# Altium PCB AM335x_EVM_PMconnect_Rev2.PcbDoc
Units mil, origin at the board's own origin, x right, y up, seen from the top; angles counter-clockwise.
Board outline 4530 x 4250 mil, 2 copper layers (Top Layer, Bottom Layer); 22 components, 40 nets, 104 pads, 7 vias.
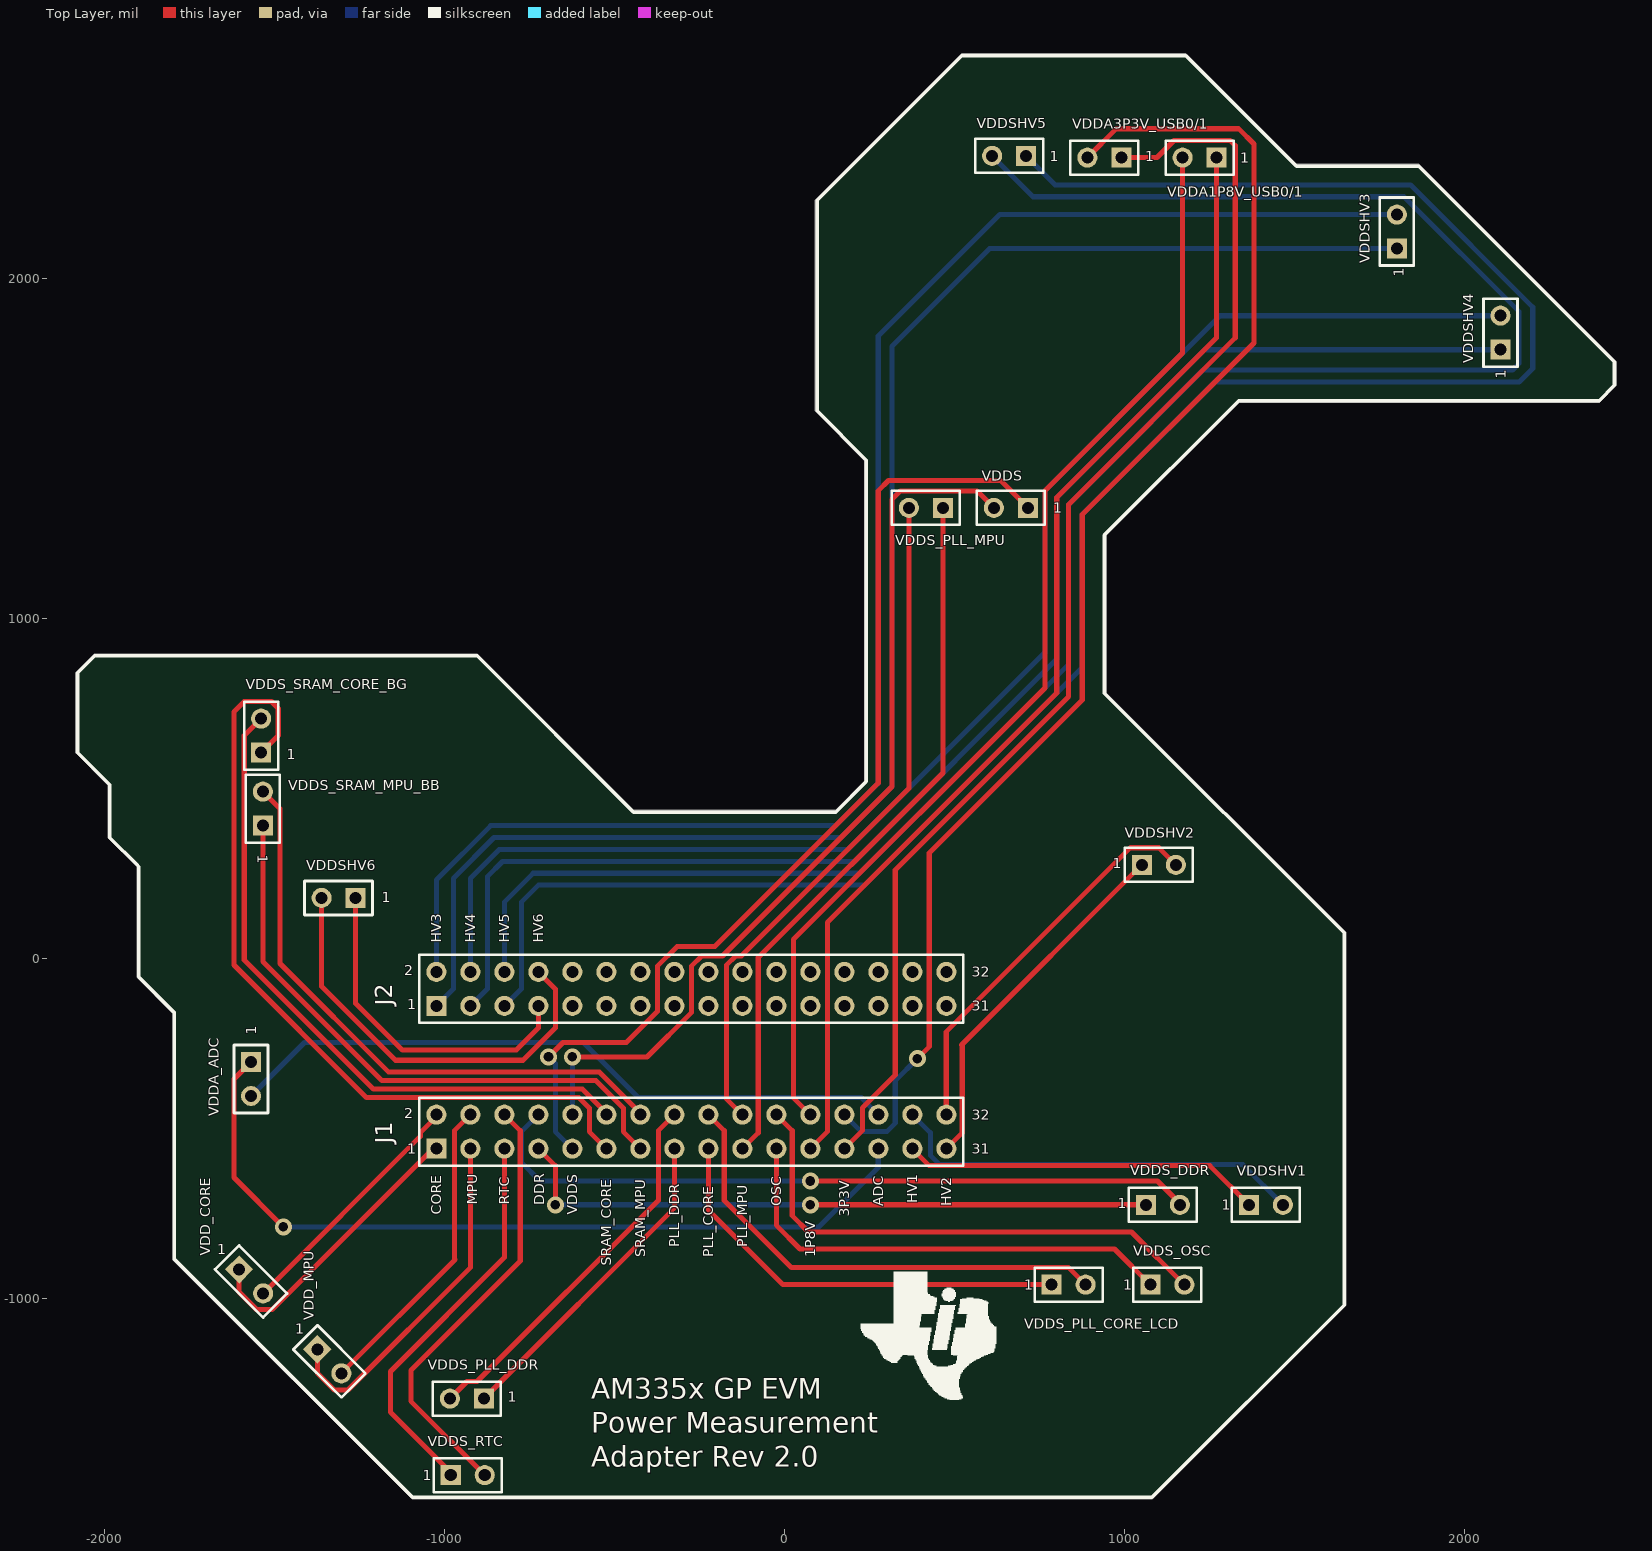
[diagram p0: Top Layer view]
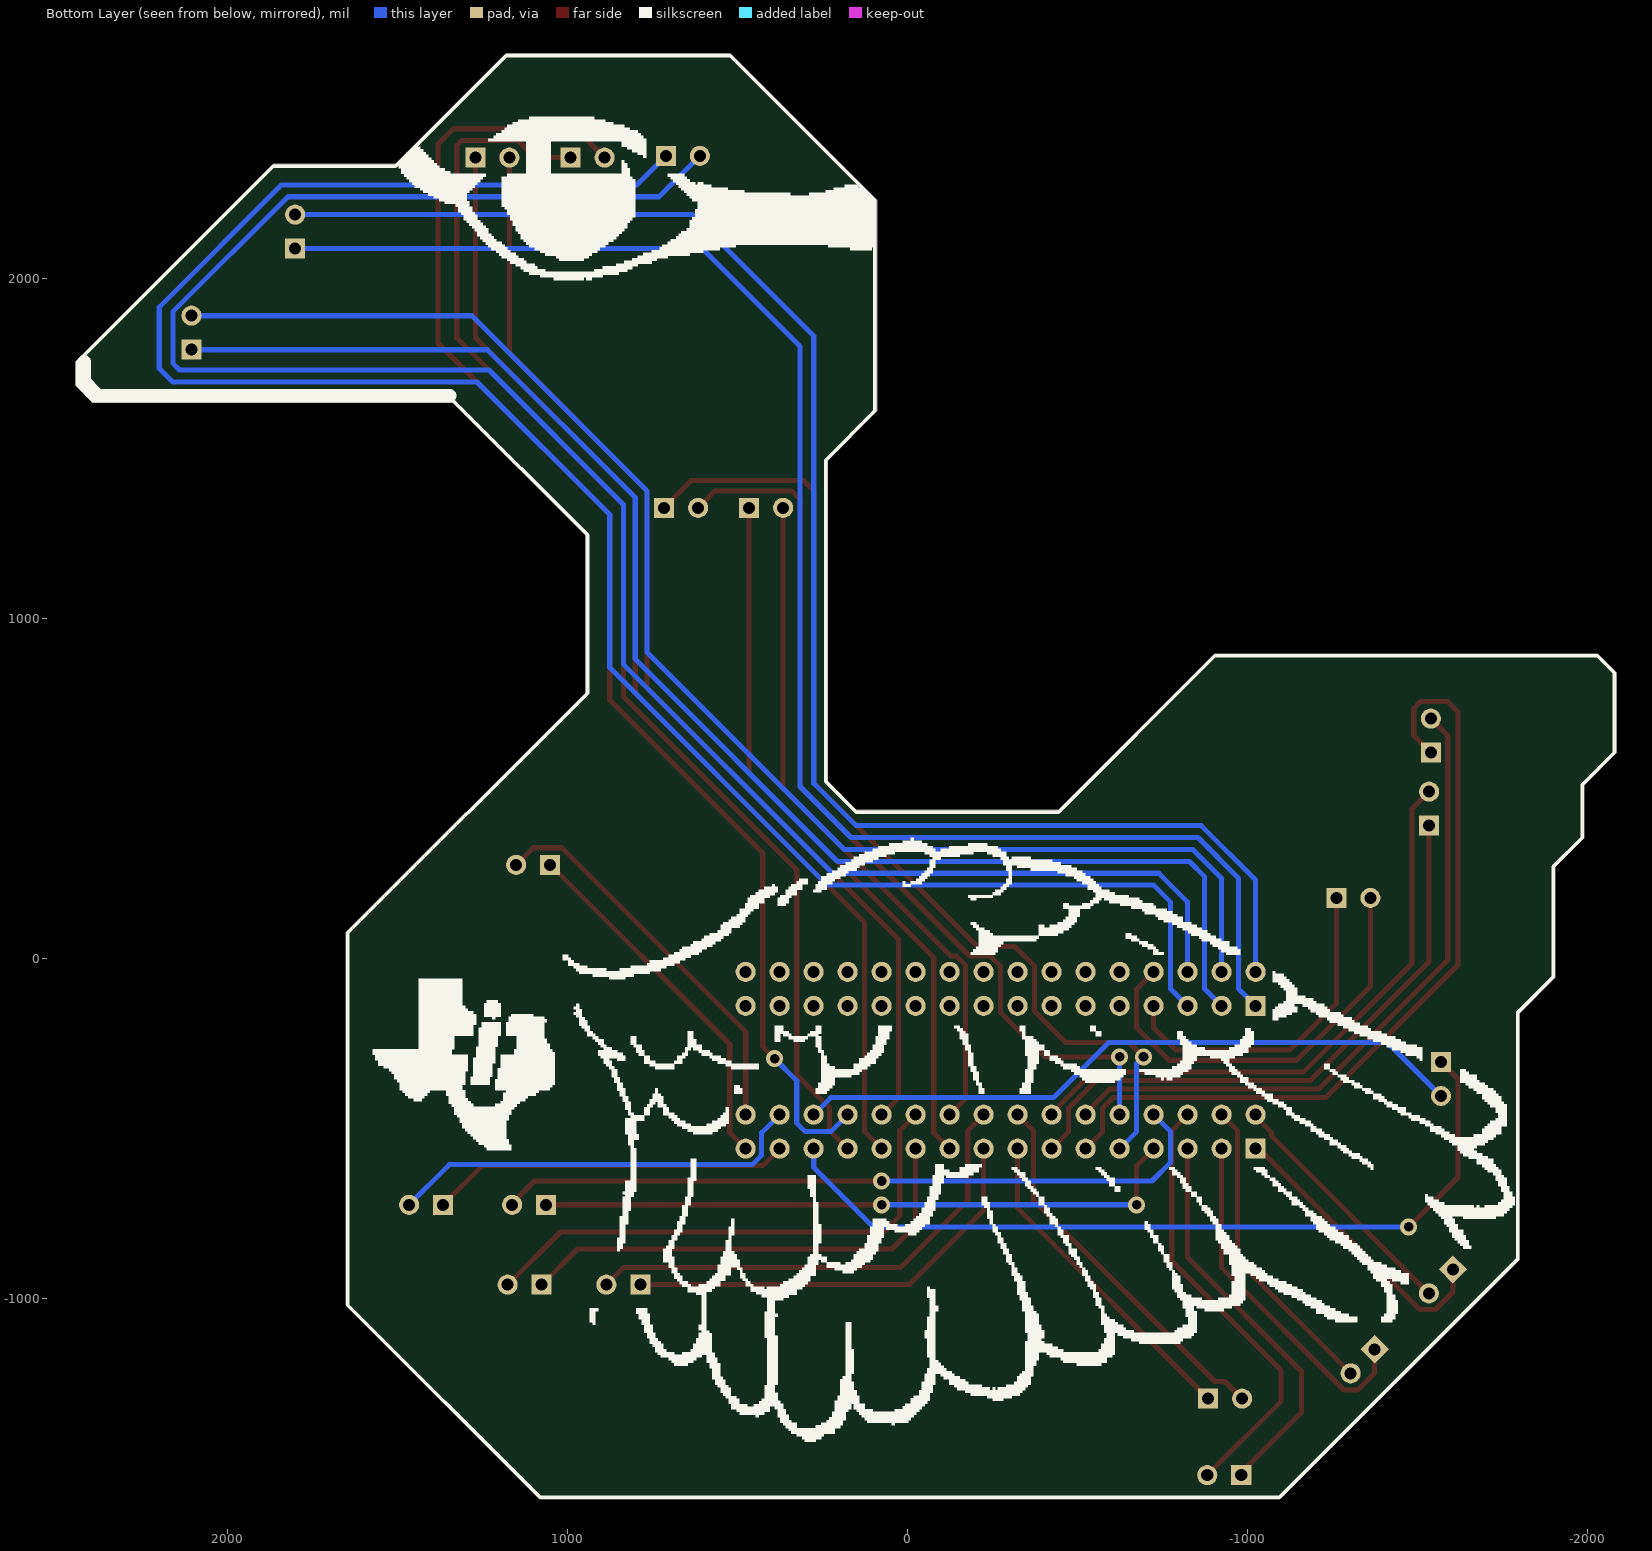
[diagram p1: Bottom Layer view, seen from below]

## Layer stack, top to bottom
Top Layer: signal copper 1.4
Dielectric: dielectric 12.6, FR-4, Dk 4.8
Bottom Layer: signal copper 1.4

## Board outline
1180,2660 1505,2335 1865,2335 2445,1755 2445,1685 2395,1635 1335,1635 945,1245 945,780 1650,75 1650,-1020 1080,-1590 -1095,-1590 -1800,-885 -1800,-160 -1905,-55 -1905,270 -1990,355 -1990,510 -2085,605 -2085,840 -2030,895 -905,895 -445,435 150,435 235,520 235,1465 90,1610 90,2230 520,2660 1180,2660 1505,2335

## Design rules (kind name [scope] priority, off if disabled: settings)
Clearance [All] p1: gap=10
PolygonConnect [All] p1: connectstyle=Relief reliefconductorwidth=10 reliefentries=4 polygonreliefangle="90 Angle"
RoomDefinition AM335x_EVM_PMconnect_Rev2 [InComponentClass('AM335x_EVM_PMconnect_Rev2')] p1: confinementstyle=ConfineIn formatcopy=TRUE lockcomponents=FALSE outline -4085,-3050 4680,-3050 4680,3445 -4085,3445
RoutingVias [All] p1: holewidth=28 width=50 viastyle="Through Hole" minholewidth=28 minwidth=50 maxholewidth=28 maxwidth=50
SilkscreenOverComponentPads [All] p1: minsilkscreentomaskgap=10
SolderMaskExpansion [All] p1: expansion=4
Width [All] p1: maxlimit=15 minlimit=15 preferedwidth=10
27 further rules are at their usual default settings.

## Components (designator, comment, footprint, x,y, rotation, side; value= is the part's Value field where it differs from the comment)
J1 "Header 16X2" HDR2X16 -1025,-560 r0 top
J2 "Header 16X2" HDR2X16 -1025,-140 r0 top
VDD_CORE "Header 2" HDR1X2 -1605,-915 r315 top
VDD_MPU "Header 2" HDR1X2 -1375,-1150 r315 top
VDDA1P8V_USB0/1 "Header 2" HDR1X2 1270,2355 r180 top
VDDA3P3V_USB0/1 "Header 2" HDR1X2 990,2355 r180 top
VDDA_ADC "Header 2" HDR1X2 -1570,-305 r270 top
VDDS "Header 2" HDR1X2 715,1325 r180 top
VDDS_DDR "Header 2" HDR1X2 1062,-725 r0 top
VDDS_OSC "Header 2" HDR1X2 1075,-960 r0 top
VDDS_PLL_CORE_LCD "Header 2" HDR1X2 785,-960 r0 top
VDDS_PLL_DDR "Header 2" HDR1X2 -885,-1295 r180 top
VDDS_PLL_MPU "Header 2" HDR1X2 465,1325 r180 top
VDDS_RTC "Header 2" HDR1X2 -982.5,-1520 r0 top
VDDS_SRAM_CORE_BG "Header 2" HDR1X2 -1540,605 r90 top
VDDS_SRAM_MPU_BB "Header 2" HDR1X2 -1535,390 r90 top
VDDSHV1 "Header 2" HDR1X2 1365,-725 r0 top
VDDSHV2 "Header 2" HDR1X2 1050,275 r0 top
VDDSHV3 "Header 2" HDR1X2 1800,2087.5 r90 top
VDDSHV4 "Header 2" HDR1X2 2105,1790 r90 top
VDDSHV5 "Header 2" HDR1X2 710,2360 r180 top
VDDSHV6 "Header 2" HDR1X2 -1262.5,177.5 r180 top

## Footprints (in the part's own frame and the unit in brackets; to place one, negate y for a bottom-side part, rotate by r counter-clockwise, add the part's x,y. Pads: shape width x height; smd on the part's side, far side on the other; paste and mask are expansions set on the pad)
HDR1X2 [mm] "Connector; Header; 2 Position"
  rect 1.5x1.5 hole 0.9: 1(0,0)
  round 1.5 hole 0.9: 2(2.54,0)
  silkscreen extent -1.27,-1.27 3.81,1.27
HDR2X16 [mm] "Connector; Header; 16x2 Position"
  rect 1.5x1.5 hole 0.9: 1(0,0)
  round 1.5 hole 0.9: 2(0,2.54) 3(2.54,0) 4(2.54,2.54) 5(5.08,0) 6(5.08,2.54) 7(7.62,0) 8(7.62,2.54) 9(10.16,0) 10(10.16,2.54) 11(12.7,0) 12(12.7,2.54) 13(15.24,0) 14(15.24,2.54) 15(17.78,0) 16(17.78,2.54) 17(20.32,0) 18(20.32,2.54) 19(22.86,0) 20(22.86,2.54) 21(25.4,0) 22(25.4,2.54) 23(27.94,0) 24(27.94,2.54) 25(30.48,0) 26(30.48,2.54) 27(33.02,0) 28(33.02,2.54) 29(35.56,0) 30(35.56,2.54) 31(38.1,0) 32(38.1,2.54)
  silkscreen extent -1.27,-1.27 39.37,3.81

## Part data
J1 J2: "Header, 16-Pin, Dual row"
VDD_CORE VDD_MPU VDDA1P8V_USB0/1 VDDA3P3V_USB0/1 VDDA_ADC VDDS VDDS_DDR VDDS_OSC VDDS_PLL_CORE_LCD VDDS_PLL_DDR VDDS_PLL_MPU VDDS_RTC VDDS_SRAM_CORE_BG VDDS_SRAM_MPU_BB VDDSHV1 VDDSHV2 VDDSHV3 VDDSHV4 VDDSHV5 VDDSHV6: "Header, 2-Pin"

## Via types
v1: diameter 50, hole 28, Top Layer to Bottom Layer, 7 vias

## Nets (pads, with @x,y where several pads share a name; then routed paths per layer and width w, separated by ;. In a path a pad name is that pad's centre, name@x,y a point inside that pad or via, vN(x,y) a via of type N, cw(c..) or ccw(c..) an arc to the next point about the centre after c; other vN are vias at no path point)
1P8_N: J1.24 VDDA1P8V_USB0/1.2 | length 3310
  Top Layer w15: J1.24 25,-410 25,55 765,795 765,1375 1170,1780 VDDA1P8V_USB0/1.2
1P8_P: J1.23 VDDA1P8V_USB0/1.1 | length 3410
  Top Layer w15: J1.23 125,-510 125,105 800,780 800,1355 1270,1825 VDDA1P8V_USB0/1.1
3P3_N: J1.26 VDDA3P3V_USB0/1.2 | length 4041.9
  Top Layer w15: v1(390,-295) 425,-260 425,310 875,760 875,1305 1380,1810 1380,2395 1335,2440 975,2440 VDDA3P3V_USB0/1.2
  Bottom Layer w15: J1.26 225,-510 300,-510 325,-485 325,-360 v1(390,-295)
3P3_P: J1.25 VDDA3P3V_USB0/1.1 | length 3788.3
  Top Layer w15: J1.25 227.97,-507.03 227.97,-440.52 325,-343.49 325,260 835,770 835,1335 1325,1825 1325,2390 1310,2405 1145,2405 1095,2355 VDDA3P3V_USB0/1.1
ADC_N: J1.28 VDDA_ADC.2 | length 1998.3
  Bottom Layer w15: VDDA_ADC.2 -1412.5,-247.5 -592.5,-247.5 -430,-410 225,-410 J1.28
ADC_P: J1.27 VDDA_ADC.1 | length 2443.3
  Top Layer w15: VDDA_ADC.1 -1620,-355 -1620,-645 v1(-1475,-790)
  Bottom Layer w15: v1(-1475,-790) 100,-790 275,-615 J1.27
CORE_N: J1.2 VDD_CORE.2 | length 730.7
  Top Layer w15: VDD_CORE.2 -1072.03,-523.45 -1072.03,-512.97 J1.2@-1025,-465.94
CORE_P: J1.1 VDD_CORE.1 | length 863.5
  Top Layer w15: VDD_CORE.1 -1605,-981.51 -1553.77,-1032.74 -1507.74,-1032.74 -1035,-560 J1.1
DDR_N: J1.8 VDDS_DDR.2 | length 2156.8
  Top Layer w15: v1@70,-670 v1@70,-665 ; v1(75,-655) 1096,-655 1162,-721 VDDS_DDR.2
  Bottom Layer w15: J1.8 -775,-510 -775,-600 -720,-655 v1(75,-655)
DDR_P: J1.7 VDDS_DDR.1 | length 1922.7
  Top Layer w15: J1.7 -675,-610 v1(-675,-725) ; v1(75,-725) VDDS_DDR.1
  Bottom Layer w15: v1(-675,-725) v1(75,-725)
HV1_N: J1.30 VDDSHV1.2 | length 1238.7
  Bottom Layer w15: J1.30 427.97,-512.97 427.97,-579.48 455.52,-607.03 1347.03,-607.03 VDDSHV1.2
HV1_P: J1.29 VDDSHV1.1 | length 1058.3
  Top Layer w15: J1.29 425,-610 1250,-610 VDDSHV1.1
HV2_N: J1.32 VDDSHV2.2 | length 1160.1
  Top Layer w15: J1.32 475,-216.2 1016.2,325 ; 1019.73,325 1100,325 VDDSHV2.2
HV2_P: J1.31 VDDSHV2.1 | length 1074.9
  Top Layer w15: J1.31 522.03,-512.97 522.03,-257.03 520,-255 VDDSHV2.1
HV3_N: J2.2 VDDSHV3.2 | length 4676.1
  Bottom Layer w15: J2.2 -1025,230 -865,390 150,390 275,515 275,1830 632.5,2187.5 VDDSHV3.2
HV3_P: J2.1 VDDSHV3.1 | length 4696.6
  Bottom Layer w15: J2.1 -975,-90 -975,235 -855,355 165,355 315,505 315,1800 602.5,2087.5 VDDSHV3.1
HV4_N: J2.4 VDDSHV4.2 | length 4268.8
  Bottom Layer w15: J2.4 -925,235 -840,320 185,320 765,900 765,1375 1280,1890 VDDSHV4.2
HV4_P: J2.3 VDDSHV4.1 | length 4301
  Bottom Layer w15: J2.3 -875,-90 -875,240 -830,285 205,285 800,880 800,1355 1235,1790 VDDSHV4.1
HV5_N: J2.6 VDDSHV5.2 | length 6013.3
  Bottom Layer w15: J2.6 -825,165 -740,250 220,250 835,865 835,1335 1230,1730 2140,1730 2160,1750 2160,1901.51 1821.51,2240 730,2240 VDDSHV5.2
HV5_P: J2.5 VDDSHV5.1 | length 6069
  Bottom Layer w15: J2.5 -775,-90 -775,165 -725,215 235,215 875,855 875,1305 1265,1695 2160,1695 2200,1735 2200,1915 1840,2275 795,2275 VDDSHV5.1
HV6_N: J2.8 VDDSHV6.2 | length 1262.7
  Top Layer w15: VDDSHV6.2 -1362.5,-82.5 -1145,-300 -770,-300 -675,-205 -675,-90 J2.8
HV6_P: J2.7 VDDSHV6.1 | length 996.4
  Top Layer w15: VDDSHV6.1 -1262.5,-132.5 -1125,-270 -790,-270 -725,-205 J2.7
MPU_N: J1.4 VDD_MPU.2 | length 919.5
  Top Layer w15: VDD_MPU.2 -970,-886.42 -972.03,-884.39 -972.03,-507.03 J1.4
MPU_P: J1.3 VDD_MPU.1 | length 1039.8
  Top Layer w15: VDD_MPU.1 -1375,-1220 -1325,-1270 -1285,-1270 -925,-910 J1.3
OSC_N: J1.22 VDDS_OSC.2 | length 1553.6
  Top Layer w15: J1.22 22.03,-507.03 22.03,-757.03 70,-805 1020,-805 VDDS_OSC.2
OSC_P: J1.21 VDDS_OSC.1 | length 1397.5
  Top Layer w15: J1.21 -25,-785 45,-855 970,-855 VDDS_OSC.1
PLL_CORE_N: J1.18 VDDS_PLL_CORE_LCD.2 | length 1437.2
  Top Layer w15: J1.18 -177.97,-507.03 -177.97,-712.03 20,-910 835,-910 VDDS_PLL_CORE_LCD.2
PLL_CORE_P: J1.17 VDDS_PLL_CORE_LCD.1 | length 1281.1
  Top Layer w15: J1.17 -225,-740 -5,-960 VDDS_PLL_CORE_LCD.1
PLL_DDR_N: J1.16 VDDS_PLL_DDR.2 | length 1126
  Top Layer w15: VDDS_PLL_DDR.2 -935,-1245 -905,-1245 -372.03,-712.03 -372.03,-507.03 J1.16
PLL_DDR_P: J1.15 VDDS_PLL_DDR.1 | length 967
  Top Layer w15: VDDS_PLL_DDR.1 -325,-735 J1.15
PLL_MPU_N: J1.20 VDDS_PLL_MPU.2 | length 2036.6
  Top Layer w15: J1.20 -172.03,-412.97 -172.03,-20.52 -144.48,7.03 -127.97,7.03 365,500 VDDS_PLL_MPU.2
PLL_MPU_P: J1.19 VDDS_PLL_MPU.1 | length 2129.4
  Top Layer w15: J1.19 -77.97,-512.97 -77.97,2.03 465,545 VDDS_PLL_MPU.1
RTC_N: J1.6 VDDS_RTC.2 | length 1303
  Top Layer w15: VDDS_RTC.2 -1100,-1302.5 -1100,-1212.5 -777.97,-890.47 -777.97,-507.03 J1.6
RTC_P: J1.5 VDDS_RTC.1 | length 1164.8
  Top Layer w15: VDDS_RTC.1@-982.5,-1512.5 -1160,-1335 -1160,-1215 -825,-880 J1.5
SRAM_CORE_N: J1.12 VDDS_SRAM_CORE_BG.2 | length 1987.3
  Top Layer w15: VDDS_SRAM_CORE_BG.2 -1590,655 -1590,-5 -1210,-385 -594.64,-385 -525,-454.64 J1.12
SRAM_CORE_P: J1.11 VDDS_SRAM_CORE_BG.1 | length 2406.1
  Top Layer w15: VDDS_SRAM_CORE_BG.1 -1490,655 -1490,735 -1510,755 -1590,755 -1620,725 -1620,-20 -1230,-410 -605,-410 -575,-440 -575,-510 J1.11
SRAM_MPU_N: J1.14 VDDS_SRAM_MPU_BB.2 | length 1773.2
  Top Layer w15: VDDS_SRAM_MPU_BB.2 -1485,440 -1485,-15 -1165,-335 -544.64,-335 -425,-454.64 J1.14
SRAM_MPU_P: J1.13 VDDS_SRAM_MPU_BB.1 | length 1778.8
  Top Layer w15: VDDS_SRAM_MPU_BB.1 -1535,-10 -1185,-360 -555,-360 -475,-440 -475,-510 J1.13
VDDS_N: J1.10 VDDS.2 | length 2695.3
  Top Layer w15: v1(-625,-290) -405,-290 -275,-160 -275,-23.49 -244.48,7.03 -182.97,7.03 315,505 315,1350 340,1375 565,1375 VDDS.2
  Bottom Layer w15: J1.10 v1(-625,-290)
VDDS_P: J1.9 VDDS.1 | length 3024.7
  Top Layer w15: v1(-695,-290) -652.5,-247.5 -465.99,-247.5 -375,-156.51 ; -375,-155.75 -375,-23.49 -316.51,35 -205.71,35 275,515.71 275,1375 305,1405 635,1405 VDDS.1
  Bottom Layer w15: v1(-695,-290) -675,-310 -675,-510 J1.9
pads on no net: J2.9 J2.10 J2.11 J2.12 J2.13 J2.14 J2.15 J2.16 J2.17 J2.18 J2.19 J2.20 J2.21 J2.22 J2.23 J2.24 J2.25 J2.26 J2.27 J2.28 J2.29 J2.30 J2.31 J2.32

## Silkscreen, mask and mechanical layers (free items; w line width, h text height)
Top Overlay:
  drawing of 36 lines, arcs and shapes, not listed
  text "1" at 780,2345 h30
  text "1" at 1060,2345 h30
  text "1" at 1340,2340 h30
  text "1" at 1820,2005 h30 r90
  text "1" at 2120,1705 h30 r90
  text "1" at 790,1310 h30
  text "1" at -1465,585 h30
  text "1" at -1550,305 h30 r270
  text "1" at 965,265 h30
  text "1" at -1185,165 h30
  text "HV3" at -1010,45 h30 r90
  text "HV4" at -910,45 h30 r90
  text "HV5" at -810,45 h30 r90
  text "HV6" at -710,45 h30 r90
  text "1" at -1555,-225 h30 r90
  text "HV1" at 390,-720 h30 r90
  text "MPU" at -905,-725 h30 r90
  text "RTC" at -810,-725 h30 r90
  text "DDR" at -708,-727 h30 r90
  text "OSC" at -10,-730 h30 r90
  text "ADC" at 290,-730 h30 r90
  text "HV2" at 490,-730 h30 r90
  text "1" at 980,-735 h30
  text "1" at 1285,-740 h30
  text "CORE" at -1010,-755 h30 r90
  text "VDDS" at -610,-755 h30 r90
  text "3P3V" at 190,-760 h30 r90
  text "PLL_DDR" at -310,-850 h30 r90
  text "PLL_MPU" at -110,-850 h30 r90
  text "1" at -1670,-870 h30
  text "SRAM_MPU" at -410,-880 h30 r90
  text "PLL_CORE" at -210,-880 h30 r90
  text "1P8V" at 90,-880 h30 r90
  text "SRAM_CORE" at -510,-905 h30 r90
  text "1" at 705,-975 h30
  text "1" at 995,-975 h30
  text "1" at -1440,-1105 h30
  text "AM335x GP EVM" at -570,-1295 h60
  text "1" at -815,-1305 h30
  text "Power Measurement" at -570,-1395 h60
  text "Adapter Rev 2.0" at -570,-1495 h60
  text "1" at -1065,-1535 h30
Bottom Overlay:
  drawing of 81 lines, arcs and shapes, not listed

## Text inside footprints (layer, text, board x,y; h text height)
J1: Top Overlay "2" at -1120,-470 h30; Top Overlay "1" at -1110,-575 h30; Top Overlay "31" at 550,-575 h30; Top Overlay "32" at 550,-475 h30
J2: Top Overlay "2" at -1120,-50 h30; Top Overlay "1" at -1110,-150 h30; Top Overlay "31" at 550,-155 h30; Top Overlay "32" at 550,-55 h30